# EAGLE board threshold_control_device_smd (EAGLE 5.11)
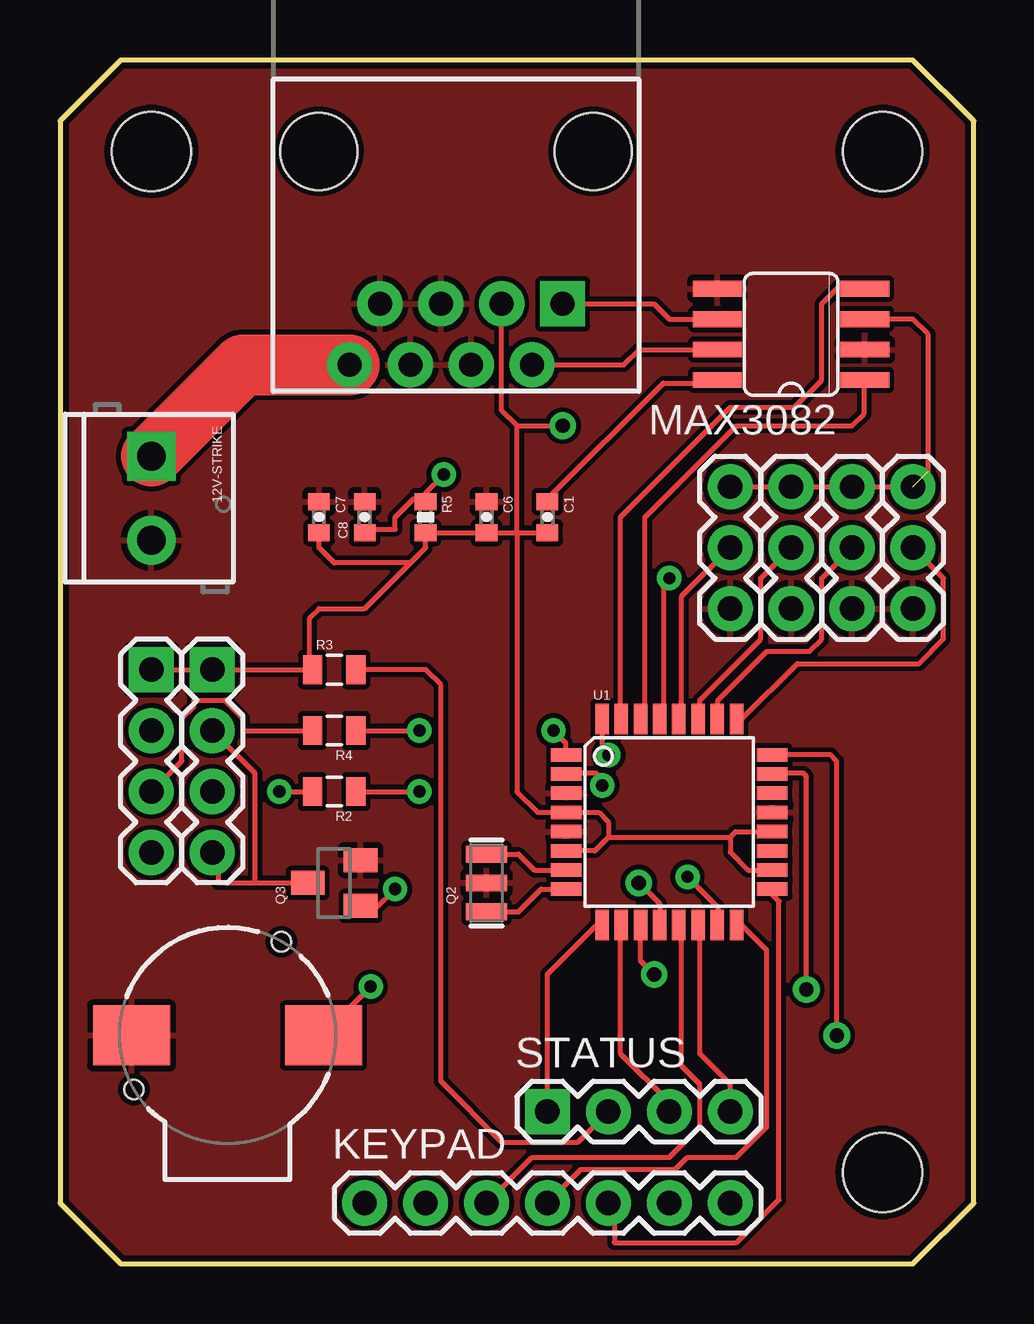
[diagram p0: board, top side]
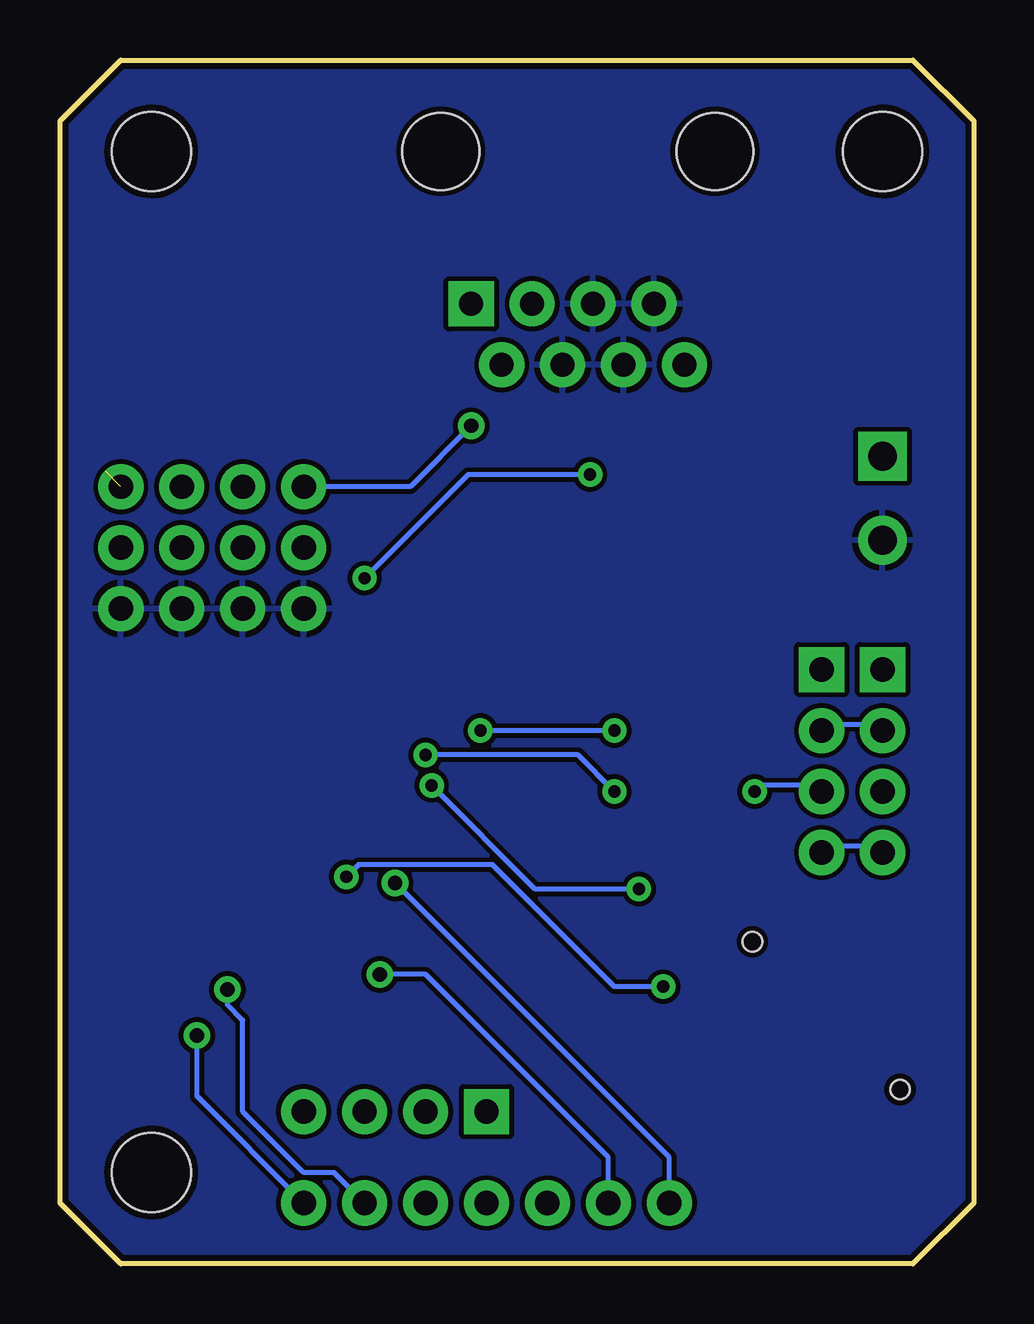
[diagram p1: board, bottom side, seen from below]

Size 38.1 x 50.16 mm. Coordinates in mm from the lower left corner, seen from the top.
Outline: 2.54,0 35.56,0 38.1,2.54 38.1,47.62 35.56,50.16 2.54,50.16 0,47.62 0,2.54 2.54,0
Copper layers (1*16): Top 0.035mm / dielectric 1.5mm / Bottom 0.035mm
Design rules "SparkFun": minimum track width 8mil, minimum drill 20mil, track to track 8mil, track to pad 8mil, pad to pad 8mil, via to via 8mil, smd to smd 8mil, copper to edge 10mil, drill to drill 8mil, minimum pad ring 12mil, minimum via ring 10mil, stop-mask expansion 4mil, vias tented up to drill 25mil, thermal gap 10mil
Net classes: 1 vcc: width 0.254 mm

## Footprints (pad centres in the part's own frame; a part is rotated, then mirrored left to right if it is on the bottom)
SCREWTERMINAL-3.5MM-2 = drill 1.2 pad 2.032 square: 1 0,0 | drill 1.2 pad 2.032 round: 2 3.5,0
BUZZER-CCV = smd 3.2 x 2.5: + 4,0; - -4,0 | hole 0.8: -3.9,-2.25; 2.25,3.9
0402-CAP = smd 0.7 x 0.9: 1 -0.65,0; 2 0.65,0
1X07 = drill 1.016 pad 1.88 round: 1 0,0; 2 2.54,0; 3 5.08,0; 4 7.62,0; 5 10.16,0; 6 12.7,0; 7 15.24,0
SO08 = smd 0.66 x 2.032: 1 -1.905,-3.073; 2 -0.635,-3.073; 3 0.635,-3.073; 4 1.905,-3.073; 5 1.905,3.073; 6 0.635,3.073; 7 -0.635,3.073; 8 -1.905,3.073
RESONATOR-SMD = smd 0.7 x 1.7: 1 -1.2,0; 2 0,0; 3 1.2,0
SOT23 = smd 1 x 1.4: 1 -0.95,-1.1; 2 0.95,-1.1; 3 0,1.1
0805 = smd 0.8 x 1.2: 1 -0.9,0; 2 0.9,0
0402-RES = smd 0.7 x 0.9: 1 -0.65,0; 2 0.65,0
1X04 = drill 1.016 pad 1.88 square: 1 0,0 | drill 1.016 pad 1.88 round: 2 2.54,0; 3 5.08,0; 4 7.62,0
1X03 = drill 1.016 pad 1.88 round: 1 0,0; 2 2.54,0; 3 5.08,0
RJ45-8 = drill 1 pad 1.88 square: 1 -4.445,6.35 | drill 1 pad 1.88 round: 2 -3.175,8.89; 3 -1.905,6.35; 4 -0.635,8.89; 5 0.635,6.35; 6 1.905,8.89; 7 3.175,6.35; 8 4.445,8.89 | hole 3.2: -5.715,0; 5.715,0
TQFP32-08 = smd 1.27 x 0.559: 1 -4.293,2.8; 2 -4.293,2; 3 -4.293,1.2; 4 -4.293,0.4; 5 -4.293,-0.4; 6 -4.293,-1.2; 7 -4.293,-2; 8 -4.293,-2.8; 17 4.293,-2.8; 18 4.293,-2; 19 4.293,-1.2; 20 4.293,-0.4; 21 4.293,0.4; 22 4.293,1.2; 23 4.293,2; 24 4.293,2.8 | smd 0.559 x 1.27: 9 -2.8,-4.293; 10 -2,-4.293; 11 -1.2,-4.293; 12 -0.4,-4.293; 13 0.4,-4.293; 14 1.2,-4.293; 15 2,-4.293; 16 2.8,-4.293; 25 2.8,4.293; 26 2,4.293; 27 1.2,4.293; 28 0.4,4.293; 29 -0.4,4.293; 30 -1.2,4.293; 31 -2,4.293; 32 -2.8,4.293
STAND-OFF = hole 3.302: 0,0

## Placement (x,y rotation side)
12V-STRIKE  [SCREWTERMINAL-3.5MM-2]  3.81,33.66 270 top
BUZZER  [BUZZER-CCV]  6.99,9.53 0 top
C1  0.1uF  [0402-CAP]  20.32,31.11 270 top
C6  0.1uF  [0402-CAP]  17.78,31.11 270 top
C7  0.1uF  [0402-CAP]  10.79,31.11 270 top
C8  0.1uF  [0402-CAP]  12.7,31.11 90 top
KEYPAD  [1X07]  12.7,2.54 0 top
MAX3082  MAX3082CSA  [SO08]  30.48,38.73 90 top
Q2  8/16/20MHz  [RESONATOR-SMD]  17.78,15.88 90 top
Q3  [SOT23]  11.43,15.88 90 top
R2  1k  [0805]  11.43,19.68 180 top
R3  330  [0805]  11.43,24.77 0 top
R4  1k  [0805]  11.43,22.23 180 top
R5  10K  [0402-RES]  15.24,31.11 270 top
RFID  [1X04]  6.35,24.77 270 top
RFID2  [1X04]  3.81,24.77 270 top
SENSOR1  [1X03]  35.56,27.3 90 top
SENSOR2  [1X03]  33.02,27.3 90 top
SENSOR3  [1X03]  30.48,27.3 90 top
SENSOR4  [1X03]  27.94,27.3 90 top
STATUS  [1X04]  20.32,6.35 0 top
TO-MCS  RJ45-8PTH  [RJ45-8]  16.51,46.35 180 top
U1  ATMEGA328  [TQFP32-08]  25.4,18.41 0 top
U$1  [STAND-OFF]  3.81,46.35 0 top
U$2  [STAND-OFF]  34.29,46.35 0 top
U$4  [STAND-OFF]  34.29,3.81 0 top

## Library data of the parts
12V-STRIKE BUZZER C1 C6-C8 KEYPAD Q2 Q3 R2-R5 RFID RFID2 SENSOR1-SENSOR4 STATUS TO-MCS U1 U$1 U$2 U$4 = SparkFun
MAX3082 = maxim; MF: MAXIM; MPN: MAX481CSA; OC_FARNELL: unknown; OC_NEWARK: 90C3817

## Nets
12V-STRIKE: 12V-STRIKE.1 TO-MCS.8
BLU: STATUS.4 U1.14
BUZZER: BUZZER.+ U1.15
GND: 12V-STRIKE.2 BUZZER.- C6.1 C7.1 C8.2 MAX3082.2 MAX3082.5 Q2.2 Q3.2 SENSOR1.1 SENSOR2.1 SENSOR3.1 SENSOR4.1 TO-MCS.4 TO-MCS.5 TO-MCS.6 TO-MCS.7 U1.3 U1.5 U1.21
GRN: STATUS.3 U1.10
KEYPAD6: KEYPAD.6 U1.23
KEYPAD7: KEYPAD.7 U1.24
N$1: C1.1 MAX3082.8
N$3: KEYPAD.5 U1.17
N$4: R3.2 STATUS.2
N$5: KEYPAD.1 U1.12
N$6: MAX3082.6 TO-MCS.1
N$7: KEYPAD.4 U1.16
N$8: KEYPAD.2 U1.11
N$9: MAX3082.7 TO-MCS.2
N$10: R2.1 U1.32
N$11: Q3.3 RFID2.2 RFID2.4 RFID.2 RFID.4
N$12: KEYPAD.3 U1.13
N$15: R4.1 U1.1
N$16: Q2.1 U1.8
N$17: Q2.3 U1.7
RED: STATUS.1 U1.9
RESET: C8.1 R5.1 U1.29
RFID-ENABLE: Q3.1 U1.2
RFID-TX: R2.2 RFID.3
RFID-TX2: R4.2 RFID2.3
SENSOR1: SENSOR1.2 U1.25
SENSOR2: SENSOR2.2 U1.26
SENSOR3: SENSOR3.2 U1.27
SENSOR4: SENSOR4.2 U1.28
SENSOR5: U1.19
SENSOR6: U1.22
TCD-RX: MAX3082.1 U1.30
TCD-TX: MAX3082.4 U1.31
VCC: C1.2 C6.2 C7.2 MAX3082.3 R3.1 R5.2 RFID2.1 RFID.1 SENSOR1.3 SENSOR2.3 SENSOR3.3 SENSOR4.3 TO-MCS.3 U1.4 U1.6 U1.18 U1.20

## Tracks (layer width: path | path; a pad name or v marks a point on that pad's centre or on a via)
12V-STRIKE
  Top 2.54: TO-MCS.8 7.62,37.47 12V-STRIKE.1
BLU
  Top 0.203: U1.14 26.67,14.1 26.67,8.76 27.94,7.49 STATUS.4
BUZZER  (via drill 0.51)
  Top 0.203: v26.16,16.13 27.43,14.86 27.43,14.35 U1.15 | v12.95,11.56 11.18,9.78 11.18,9.53 BUZZER.+
  Bottom 0.203: v26.16,16.13 25.65,16.64 20.07,16.64 14.99,11.56 v12.95,11.56
GND
  pour Bottom: -2.54,52.7 40.64,52.7 40.64,-2.54 -2.54,-2.54
  pour Top: -5.08,55.24 43.18,55.24 43.18,-5.08 -5.08,-5.08
GRN
  Top 0.203: U1.10 23.37,14.1 23.37,8.76 25.4,6.73 STATUS.3
KEYPAD6  (via drill 0.6)
  Top 0.203: U1.23 29.46,20.45 30.99,20.45 31.11,20.32 v31.11,11.43
  Bottom 0.203: v31.11,11.43 31.11,10.79 30.48,10.16 30.48,6.35 27.94,3.81 26.67,3.81 KEYPAD.6
KEYPAD7  (via drill 0.6)
  Top 0.203: U1.24 32.12,21.21 32.38,20.95 v32.38,9.53
  Bottom 0.203: v32.38,9.53 32.38,6.99 KEYPAD.7
N$1
  Top 0.203: C1.1 20.32,31.88 25.15,36.7 27.18,36.7 MAX3082.8
N$3
  Top 0.203: U1.17 29.72,15.37 29.97,15.11 29.97,2.67 28.19,0.89 23.11,0.89 23.11,2.16 22.86,2.41 KEYPAD.5
N$4
  Top 0.203: STATUS.2 21.59,5.08 18.41,5.08 15.88,7.62 15.88,24.13 15.24,24.77 R3.2
N$5  (via drill 0.6)
  Top 0.203: U1.12 25,15.01 v24.13,15.88
  Bottom 0.203: v24.13,15.88 12.7,4.45 KEYPAD.1
N$6
  Top 0.203: MAX3082.6 25.4,39.37 24.77,40.01 TO-MCS.1
N$7
  Top 0.203: U1.16 28.45,14.1 29.46,13.08 29.46,5.71 28.19,4.45 26.16,4.45 25.65,3.94 21.72,3.94 KEYPAD.4
N$8  (via drill 0.6)
  Top 0.203: U1.11 24.2,12.63 v24.77,12.06
  Bottom 0.203: v24.77,12.06 22.86,12.06 15.24,4.45 KEYPAD.2
N$9
  Top 0.203: TO-MCS.2 23.5,37.47 24.13,38.1 MAX3082.7
N$10  (via drill 0.51)
  Top 0.203: v22.86,21.21 22.61,21.46 22.61,22.48 U1.32 | R2.1 v14.99,19.68
  Bottom 0.203: v14.99,19.68 16.51,21.21 v22.86,21.21
N$11
  Top 0.203: 8.13,15.88 6.6,15.88 6.6,16.89 RFID.4 | 8.13,15.88 Q3.3 | RFID.2 8.13,20.45 8.13,15.88
  Bottom 0.203: RFID2.2 4.06,22.48 6.1,22.48 RFID.2 | RFID2.4 4.06,17.4 6.1,17.4 RFID.4
N$12
  Top 0.203: U1.13 25.91,14.1 25.91,8.26 26.67,7.49 26.67,5.71 25.4,4.45 19.68,4.45 KEYPAD.3
N$15  (via drill 0.51)
  Top 0.203: v20.57,22.23 21.08,21.72 21.08,21.46 U1.1 | R4.1 v14.99,22.23
  Bottom 0.203: v14.99,22.23 v20.57,22.23
N$16
  Top 0.203: U1.8 20.06,15.62 19.12,14.68 Q2.1
N$17
  Top 0.203: Q2.3 19.12,17.07 19.78,16.41 U1.7
RED
  Top 0.203: U1.9 22.35,14.1 20.32,12.06 STATUS.1
RESET  (via drill 0.51)
  Top 0.203: 15.24,31.88 14.73,31.88 13.97,31.11 13.97,30.61 12.7,30.61 C8.1 | v25.4,28.57 25.15,28.32 25.15,22.73 U1.29 | v16,32.89 15.24,32.13 15.24,31.88 | 15.24,31.88 R5.1
  Bottom 0.203: v25.4,28.57 21.08,32.89 v16,32.89
RFID-ENABLE  (via drill 0.51)
  Top 0.203: v22.61,19.94 22.61,20.19 22.35,20.45 21.34,20.45 U1.2 | v13.97,15.62 13.21,14.86 12.7,14.86 Q3.1
  Bottom 0.203: v22.61,19.94 18.29,15.62 v13.97,15.62
RFID-TX  (via drill 0.51)
  Top 0.203: v9.14,19.68 R2.2
  Bottom 0.203: v9.14,19.68 8.89,19.94 6.6,19.94 RFID.3
RFID-TX2
  Top 0.203: RFID2.3 5.08,20.95 5.08,22.73 5.59,23.24 5.59,23.5 6.86,23.5 7.62,22.73 7.62,22.23 R4.2
SENSOR1
  Top 0.203: U1.25 28.45,22.73 30.73,25.02 35.81,25.02 36.83,26.04 36.83,28.57 SENSOR1.2
SENSOR2
  Top 0.203: SENSOR2.2 31.75,28.57 31.75,26.04 31.24,25.53 29.46,25.53 27.43,23.5 27.43,22.73 U1.26
SENSOR3
  Top 0.203: SENSOR3.2 29.21,28.57 29.21,26.04 26.67,23.5 26.67,22.73 U1.27
SENSOR4
  Top 0.203: SENSOR4.2 25.91,27.81 25.91,22.73 U1.28
TCD-RX
  Top 0.203: U1.30 24.38,22.73 24.38,31.11 28.19,34.92 33.02,34.92 33.53,35.43 33.53,36.7 MAX3082.1
TCD-TX
  Top 0.203: U1.31 23.37,22.73 23.37,31.11 27.94,35.69 30.61,35.69 31.75,36.83 31.75,40.01 32.51,40.77 33.53,40.77 MAX3082.4
VCC  (via drill 0.6)  (1 unrouted)
  Top 0.203: R5.2 15.24,30.35 | RFID2.1 RFID.1 10.41,24.77 | MAX3082.3 35.56,39.37 36.2,38.73 36.2,33.02 | 10.41,24.77 R3.1 | 10.41,24.77 10.41,26.92 10.79,27.3 12.7,27.3 14.61,29.21 | R5.2 C6.2 19.04,30.46 | TO-MCS.3 18.41,35.56 19.05,34.92 | 19.05,30.48 19.05,34.92 | 19.04,30.46 19.05,30.48 | C1.2 19.07,30.46 19.05,30.48 | R5.2 15.24,29.84 14.61,29.21 | 14.61,29.21 11.43,29.21 10.79,29.84 C7.2 | 19.04,30.46 19.05,30.45 19.05,19.68 19.92,18.82 U1.4 22.46,18.82 22.86,18.41 22.86,17.78 | U1.6 22.3,17.21 22.86,17.78 | U1.18 28.67,16.41 27.94,17.14 27.94,17.78 | U1.20 28.18,18.02 27.94,17.78 | 22.86,17.78 27.94,17.78 | SENSOR1.3 SENSOR2.3 SENSOR3.3 SENSOR4.3 | 19.05,34.92 v20.95,34.92
  Bottom 0.203: SENSOR4.3 23.5,32.38 v20.95,34.92